# Altium PCB PCB.PcbDoc
Units mm, origin at the board's own origin, x right, y up, seen from the top; angles counter-clockwise.
Board outline 55 x 45 mm, 2 copper layers (Top Layer, Bottom Layer); 3 components, 3 nets, 52 pads, 0 vias.
Unrouted connection lines stored in the file: 3.
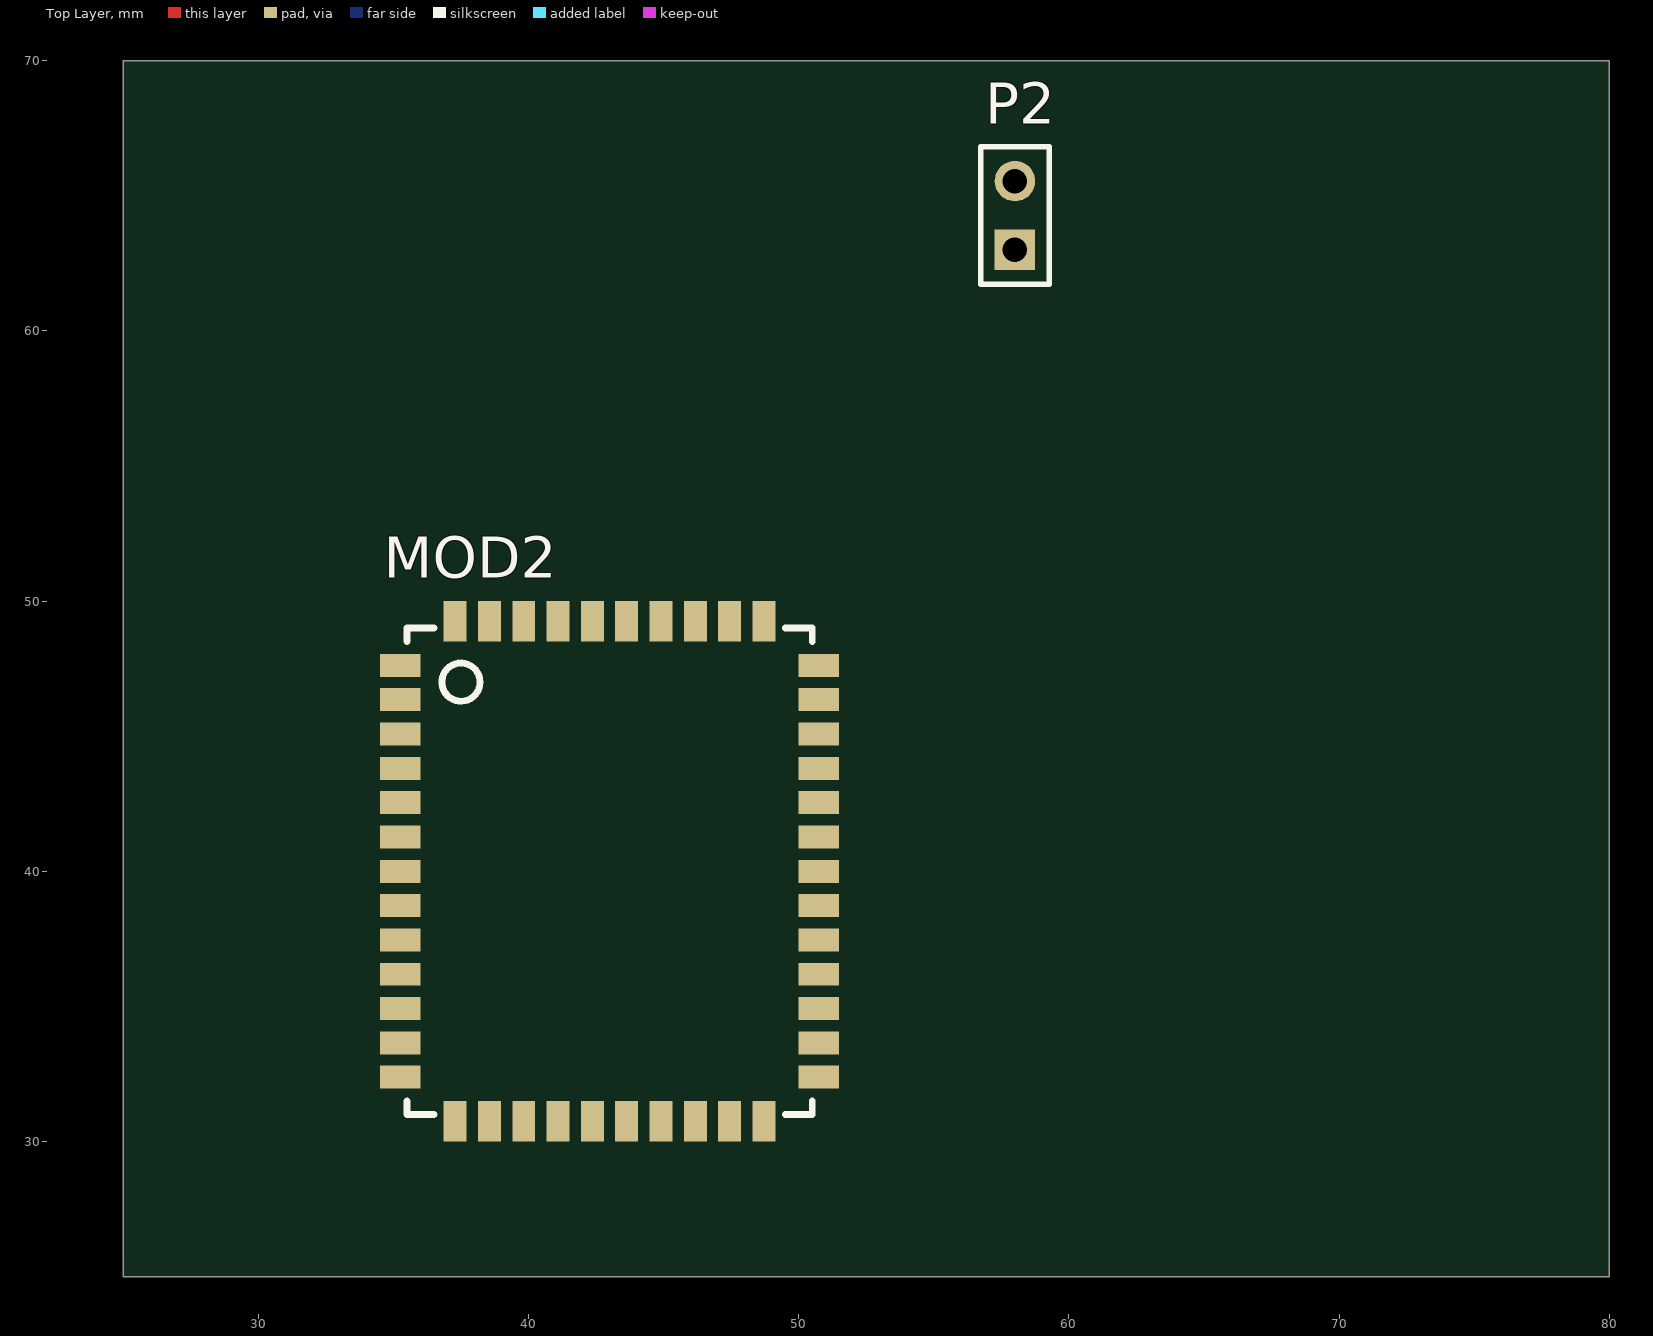
[diagram p0: Top Layer view]
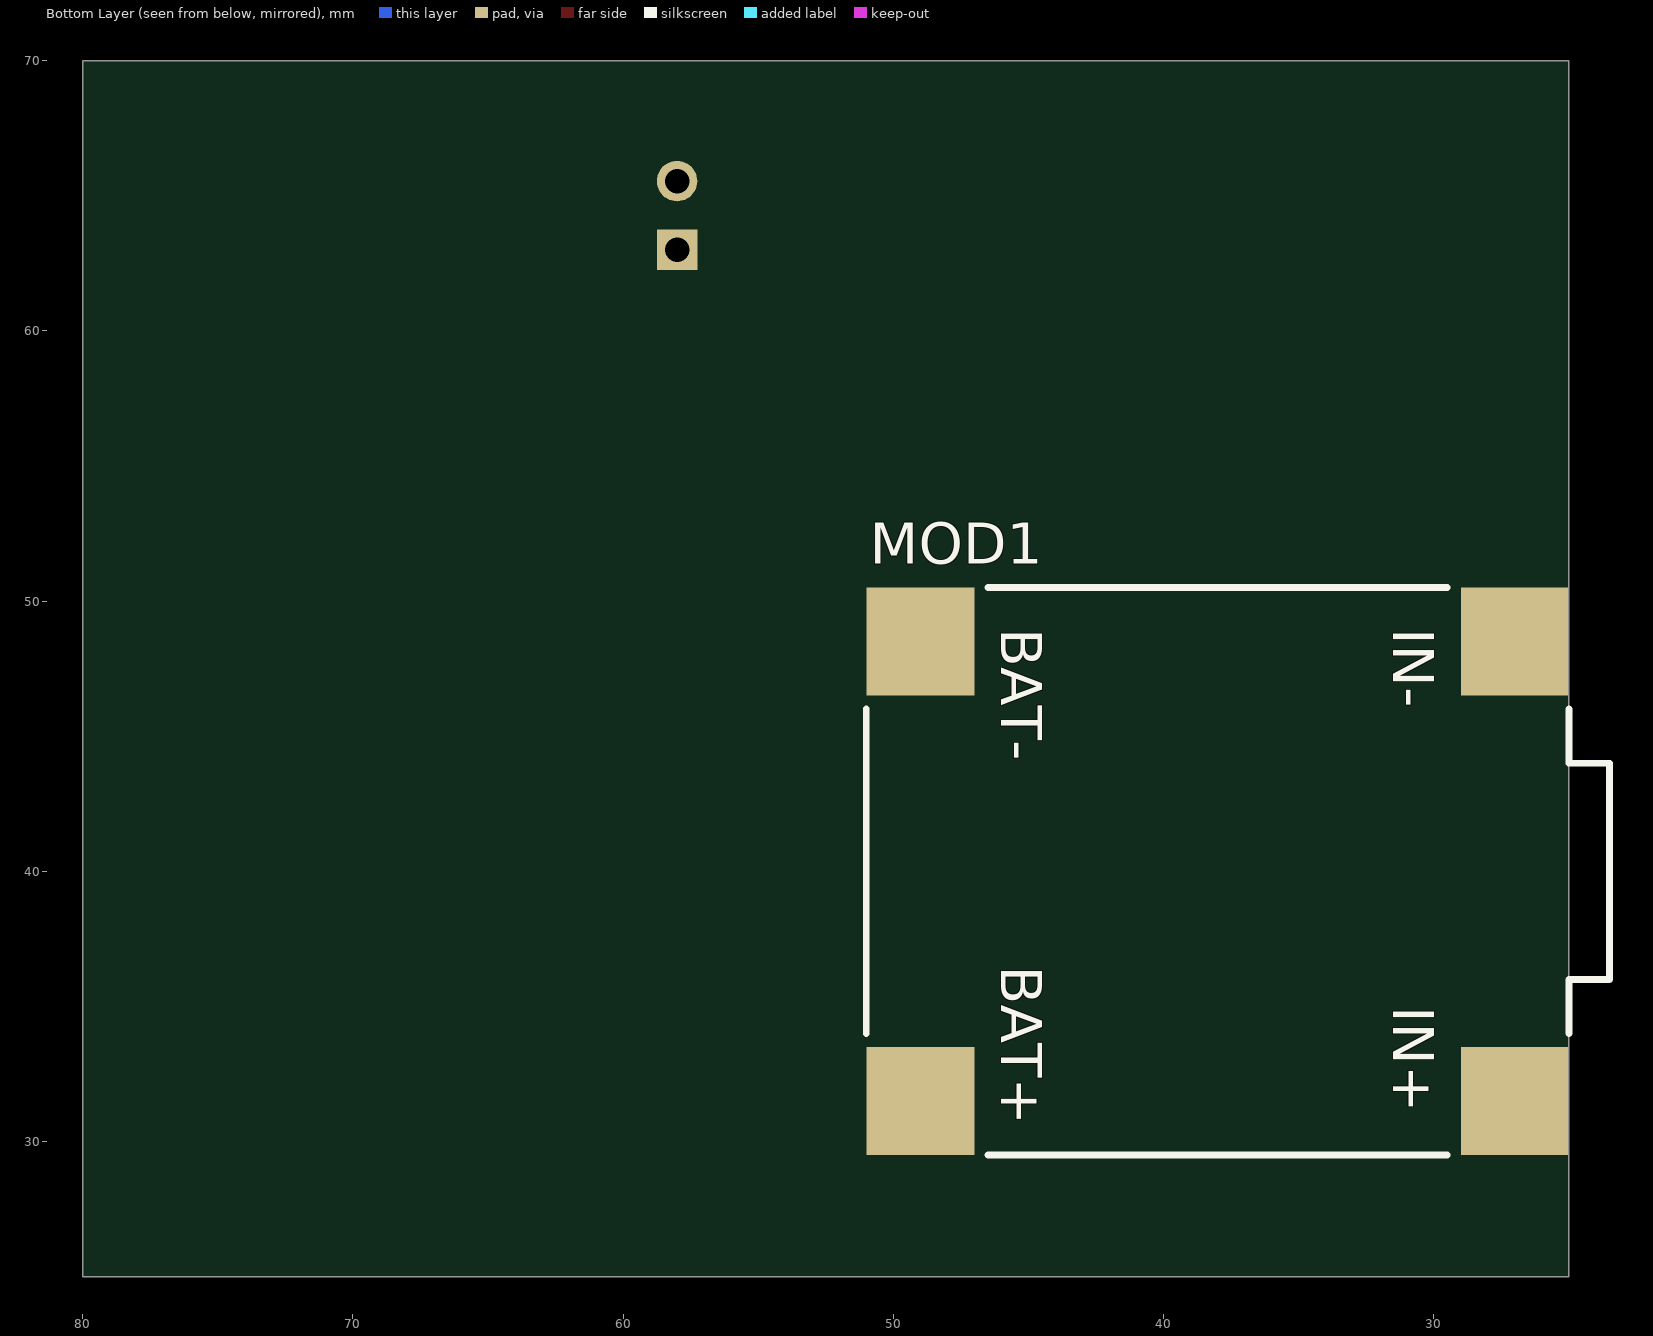
[diagram p1: Bottom Layer view, seen from below]

## Layer stack, top to bottom
Top Solder: solder mask 0.0102, Solder Resist, Dk 3.5
Top Layer: signal copper 0.0356
Dielectric 1: dielectric 0.32, FR-4, Dk 4.8
Bottom Layer: signal copper 0.0356
Bottom Solder: solder mask 0.0102, Solder Resist, Dk 3.5

## Board outline
25,25 25,70 80,70 80,25

## Design rules (kind name [scope] priority, off if disabled: settings)
Clearance [All] p1: gap=0.254 ignorepadtopadclearanceinfootprint=FALSE except(0: Arc-Hole Track-Hole SMDPad-Hole THPad-Hole Via-Hole Fill-Hole Poly-Hole Region-Hole Text-Hole)
PolygonConnect [All] p1: connectstyle=Relief reliefconductorwidth=0.254 reliefentries=4 polygonreliefangle="90 Angle" airgapwidth=0.254
RoutingVias [All] p1: holewidth=0.711 width=1.27 viastyle="Through Hole" minholewidth=0.711 minwidth=1.27 maxholewidth=0.711 maxwidth=1.27
SolderMaskExpansion [All] p1: expansion=0.102
Width [All] p1: maxlimit=0.254 minlimit=0.254 preferedwidth=0.254
30 further rules are at their usual default settings.

## Classes and differential pairs
component class "[02.1] CSRA64215, Differential to single output conversion, ANT": MOD2 P2
component class "[02.0] Power, LiPo_charge, USB, Battery conn": MOD1 P1

## Components (designator, comment, footprint, x,y, rotation, side; value= is the part's Value field where it differs from the comment)
MOD1 "MicroUSB TP4056 1A Module" "MicroUSB TP4056 1A Module Top PCB Mount, no holes" 38,40 r270 bottom
MOD2 "CSRA64215" CSRA64215_on_top_solder_mount 43,40 r0 top
P2 "Header 2" HDR1X2 58,63 r90 top

## Footprints (in the part's own frame and the unit in brackets; to place one, negate y for a bottom-side part, rotate by r counter-clockwise, add the part's x,y. Pads: shape width x height; smd on the part's side, far side on the other; paste and mask are expansions set on the pad)
CSRA64215_on_top_solder_mount [mm] "CSRA64215 breakout module from China, foorprint for mounting it on top/bottom of the PCB"
  rect 1.5x0.85 smd: 1(-7.75,7.62) 2(-7.75,6.35) 3(-7.75,5.08) 4(-7.75,3.81) 5(-7.75,2.54) 6(-7.75,1.27) 7(-7.75,0) 8(-7.75,-1.27) 9(-7.75,-2.54) 10(-7.75,-3.81) 11(-7.75,-5.08) 12(-7.75,-6.35) 13(-7.75,-7.62) 24(7.75,-7.62) 25(7.75,-6.35) 26(7.75,-5.08) 27(7.75,-3.81) 28(7.75,-2.54) 29(7.75,-1.27) 30(7.75,0) 31(7.75,1.27) 32(7.75,2.54) 33(7.75,3.81) 34(7.75,5.08) 35(7.75,6.35) 36(7.75,7.62)
  rect 0.85x1.5 smd: 14(-5.715,-9.25) 15(-4.445,-9.25) 16(-3.175,-9.25) 17(-1.905,-9.25) 18(-0.635,-9.25) 19(0.635,-9.25) 20(1.905,-9.25) 21(3.175,-9.25) 22(4.445,-9.25) 23(5.715,-9.25) 37(5.715,9.25) 38(4.445,9.25) 39(3.175,9.25) 40(1.905,9.25) 41(0.635,9.25) 42(-0.635,9.25) 43(-1.905,9.25) 44(-3.175,9.25) 45(-4.445,9.25) 46(-5.715,9.25)
  silkscreen extent -7.5,-9 7.5,9
HDR1X2 [mm] "Connector; Header; 2 Position"
  rect 1.5x1.5 hole 0.9: 1(0,0)
  round 1.5 hole 0.9: 2(2.54,0)
  silkscreen extent -1.27,-1.27 3.81,1.27
"MicroUSB TP4056 1A Module Top PCB Mount, no holes" [mm] "MicroUSB TP4056 1A Module Mounted on the top/bottom of the PCB, no holes"
  rect 4x4 smd: 1(-8.5,11) 2(-8.5,-11) 3(8.5,-11) 4(8.5,11)
  silkscreen extent -10.5,-13 10.5,14.5

## Part data
MOD1: "Micro USB TP4056-based 1A LiPo charging module"
MOD2: "CSRA64215 breakout module from China"
P2: library part 3220-10-0300, "IDC-10 1.27mm shrouded SMD VERT CNC Tech", LatestRevisionDate=17-Jul-2002, LatestRevisionNote="Re-released for DXP Platform.", Publisher="Altium Limited"

## Nets (pads, with @x,y where several pads share a name; then routed paths per layer and width w, separated by ;. In a path a pad name is that pad's centre, name@x,y a point inside that pad or via, vN(x,y) a via of type N, cw(c..) or ccw(c..) an arc to the next point about the centre after c; other vN are vias at no path point)
0V0: MOD1.1 MOD1.2 MOD2.14
P3V7: MOD1.3
P5V0: MOD1.4 P2.1
pads on no net: MOD2.1 MOD2.2 MOD2.3 MOD2.4 MOD2.5 MOD2.6 MOD2.7 MOD2.8 MOD2.9 MOD2.10 MOD2.11 MOD2.12 MOD2.13 MOD2.15 MOD2.16 MOD2.17 MOD2.18 MOD2.19 MOD2.20 MOD2.21 MOD2.22 MOD2.23 MOD2.24 MOD2.25 MOD2.26 MOD2.27 MOD2.28 MOD2.29 MOD2.30 MOD2.31 MOD2.32 MOD2.33 MOD2.34 MOD2.35 MOD2.36 MOD2.37 MOD2.38 MOD2.39 MOD2.40 MOD2.41 MOD2.42 MOD2.43 MOD2.44 MOD2.45 MOD2.46 P2.2

## Silkscreen, mask and mechanical layers (free items; w line width, h text height)
Mechanical 13:
  the board outline again, w0.254

## Text inside footprints (layer, text, board x,y; h text height)
MOD1: Bottom Overlay "IN-" at 31.5,49 h1.52 r90; Bottom Overlay "IN+" at 31.5,35 h1.52 r90; Bottom Overlay "BAT+" at 46,36.5 h1.52 r90; Bottom Overlay "BAT-" at 46,49 h1.52 r90